# Altium PCB PCB1.PcbDoc (part 2 of 4)
Units mil, origin at the board's own origin, x right, y up, seen from the top; angles counter-clockwise.
Board outline 6796.85 x 4400 mil, 4 copper layers (Top Layer, Layer 1, Layer 2, Bottom Layer), stack 23.756 mil thick; 175 components, 152 nets, 720 pads, 180 vias.
Unrouted connection lines stored in the file: 4.
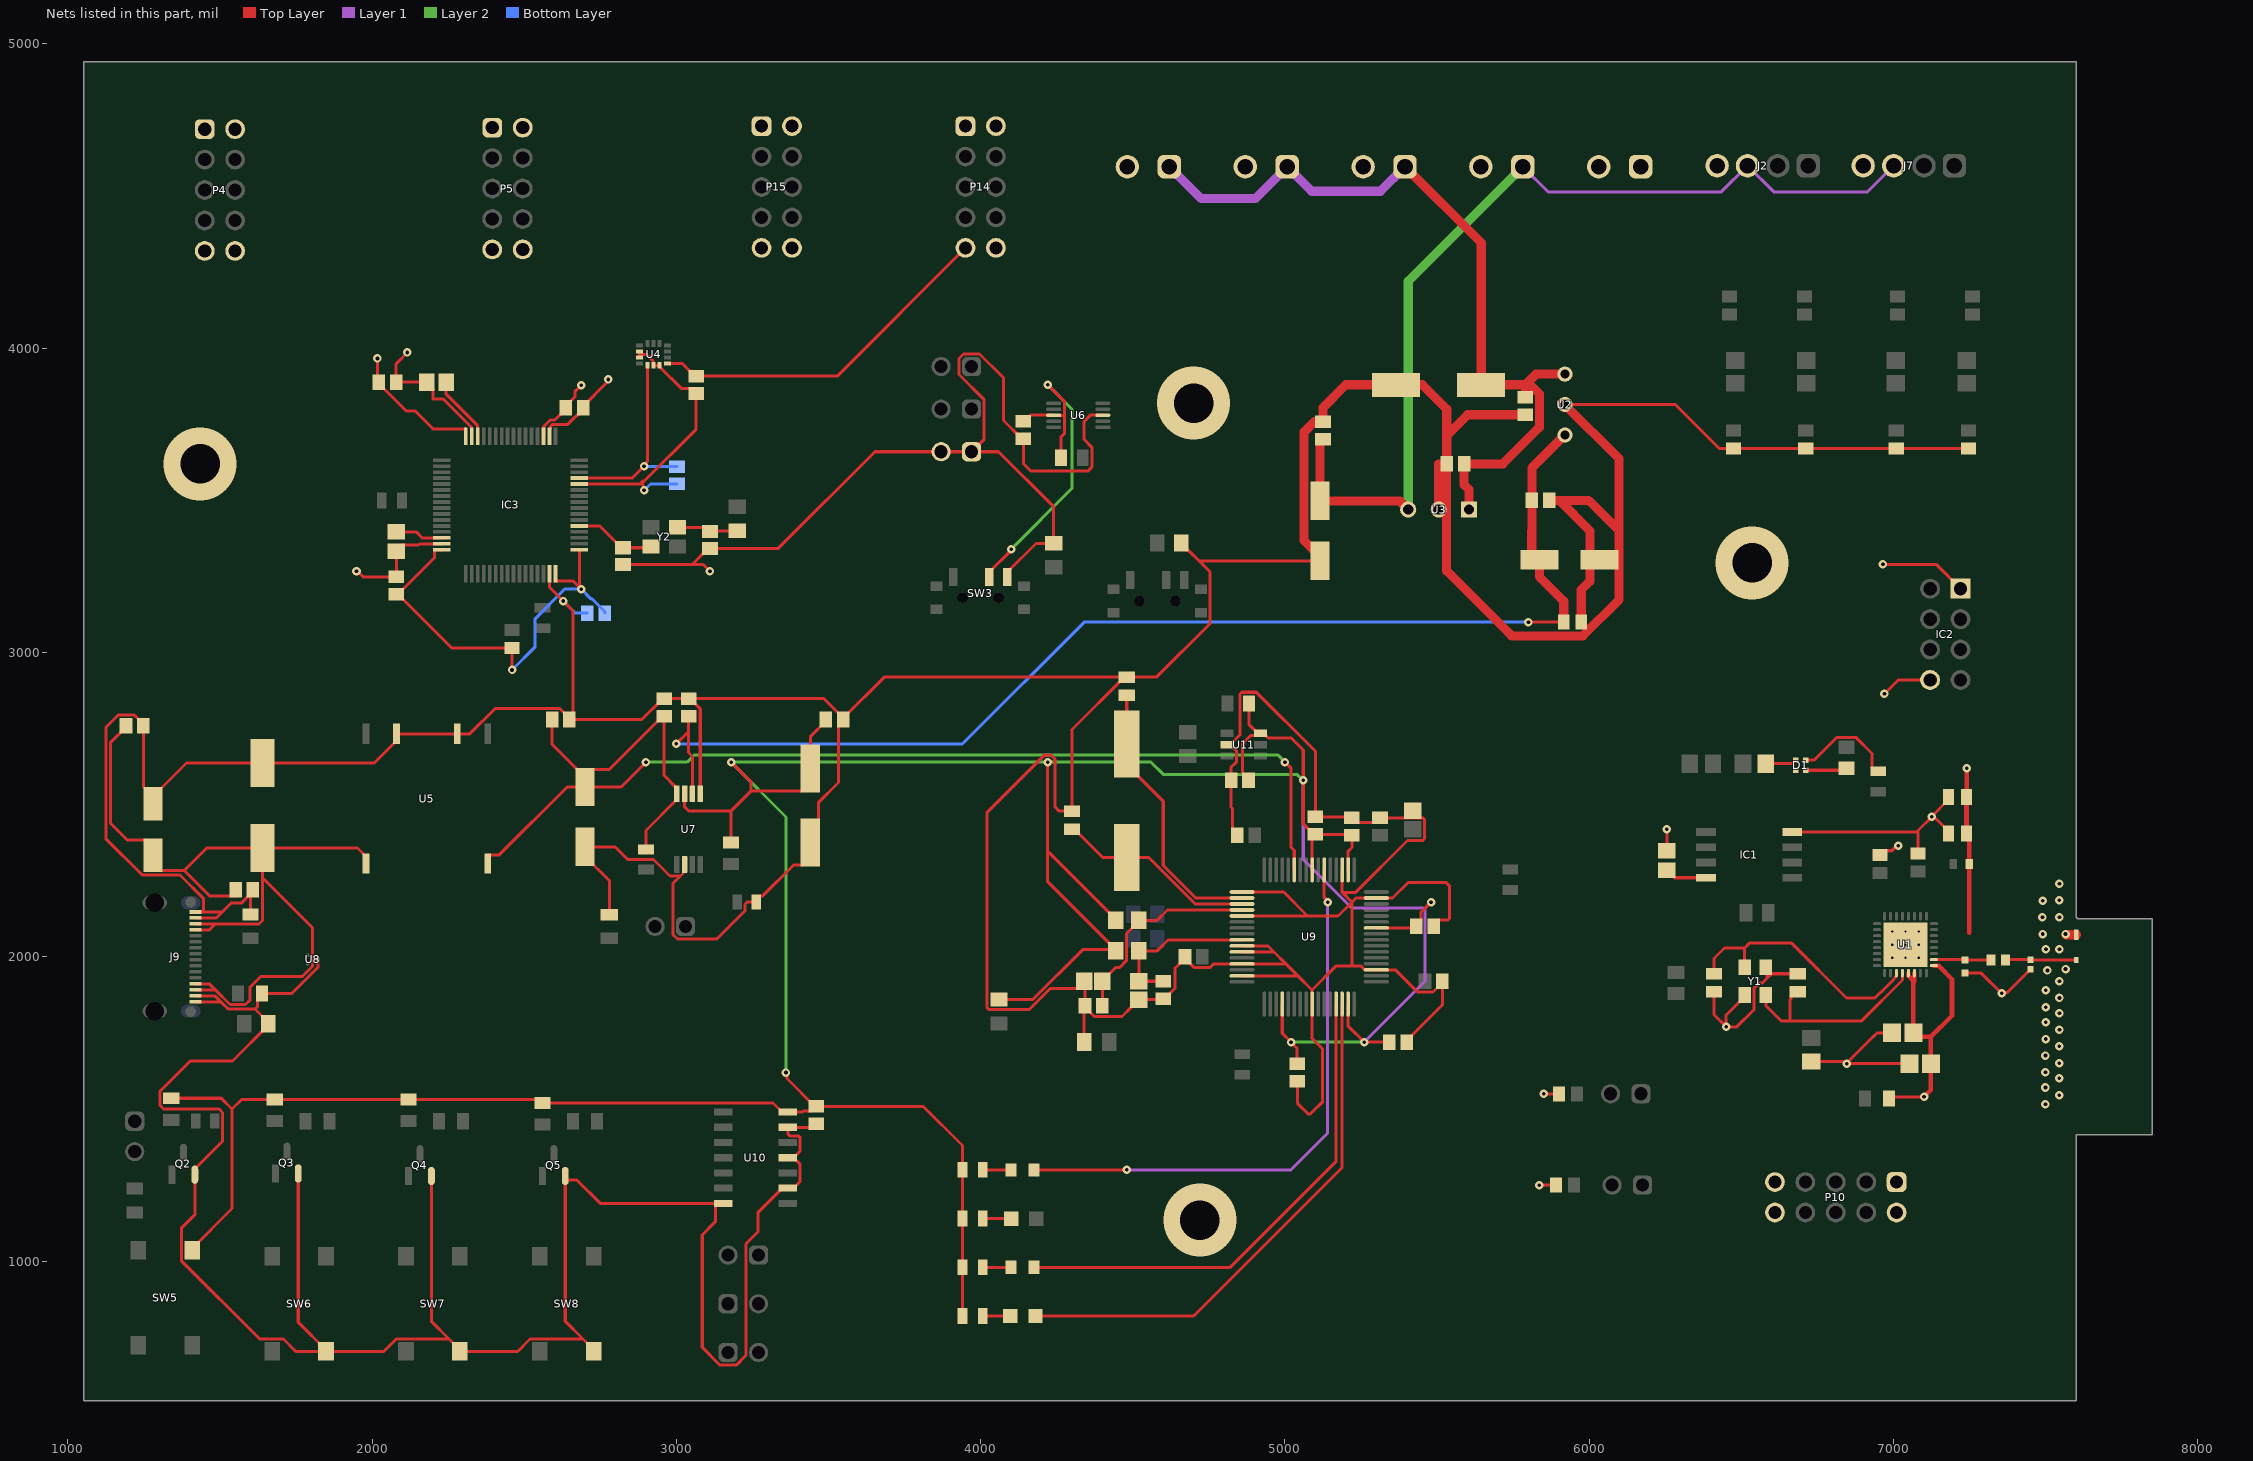
[diagram p4: the nets of this part, all layers, seen from the top]

## Part data (continued)
D2 D3: library part CMP-1724-00002-2, "LED RED DIFFUSED SMD", Case Code (Imperial)=0805, Case Code (Metric)=2012, Color=Red, Forward Current=20mA, Forward Voltage=2V, Lens Color=White, Max Operating Temperature=80°C, Min Operating Temperature=-25°C, Package Quantity=1, Approvals=UL, Case/Package=0805, Dominant Wavelength=635nm, Height=0.8mm, Illumination Color=Red, Lead Free="Lead Free", Length=2mm, Lens Style=Rectangular, Lens Transparency=Diffused, Luminous Intensity=11mcd, Mount="Surface Mount", Number of LEDs=1, Number of Pins=2, Packaging="Tape and Reel", REACH SVHC="No SVHC", Test Current=20mA, Viewing Angle=140°, Wavelength=635nm, Width=1.25mm
DS1 DS2: library part CMP-1724-00001-1, "LED, GREEN, 565 nm, 2 V, -25 to 80 degC, 2-Pin SMD, RoHS, Tape and Reel", Case Code (Imperial)=0805, Case Code (Metric)=2012, Max Operating Temperature="85 degC", Min Operating Temperature="-25 degC", Package Quantity=4000, Case\/Package=0805, ComponentLink1Description="Manufacturer URL", ComponentLink1URL=http://www.lumexinstruments.com/, ComponentLink2Description=Datasheet, ComponentLink2URL=http://www.lumex.com/content/files/ProductAttachment/SML-LXT0805GW-TR.pdf, DatasheetVersion="Rev. F, 09/2009", Length="2 mm", Mount="Surface Mount", Mounting Technology="Surface Mount", PackageDescription="2-Pin Surface Mount Device, Body 2 x 1.25 mm", PackageReference=SML-LXT0805, Packaging="Tape and Reel", REACH SVHC="No SVHC", RoHSCompliant=true, Width="1.25 mm"
FB1 FB2: library part CMP-2000-05194-2, "FERRITE BEAD 600 OHM 0805 1LN", Case Code (Imperial)=0805, Case Code (Metric)=2012, Current Rating=500mA, DC Resistance (DCR)=300mR, Frequency=100MHz, Max Operating Temperature=125°C, Min Operating Temperature=-40°C, Package Quantity=1, Case/Package=0805, Contact Plating=Tin, Core Material=Ferrite, Depth=1.45mm, Height=1.25mm, Impedance=600R, Lead Free="Lead Free", Length=2mm, Material=Ferrite, Max Current Rating=500mA, Max DC Current=500mA, Mount="Surface Mount", Number of Lines=1, Packaging="Tape and Reel", Termination=SMD/SMT, Test Frequency=100MHz, Weight=0.00392oz, Width=0.049inch
IC1: "Integrated Circuit", Manufacturer_Name=Winbond, Datasheet Link=https://www.winbond.com/hq/support/documentation/levelOne.jsp?__locale=en&DocNo=DA00-W25Q128JV, Height=2.16mm, Manufacturer_Part_Number=W25Q128JVSQ
IC2: "Integrated Circuit", Manufacturer_Name=Ai-Thinker, Datasheet Link=https://docs.ai-thinker.com/_media/esp8266/docs/esp-01_product_specification_en.pdf, Manufacturer_Part_Number=ESP-01
IC3: "Integrated Circuit", Manufacturer_Name=STMicroelectronics, Mouser Part Number=511-STM32H7A3RIT6, Arrow Part Number=STM32H7A3RIT6, Arrow Price/Stock=https://www.arrow.com/en/products/stm32h7a3rit6/stmicroelectronics, Datasheet Link=https://www.st.com/resource/en/datasheet/stm32h7a3ai.pdf, Height=1.6mm, Manufacturer_Part_Number=STM32H7A3RIT6, Mouser Price/Stock=https://www.mouser.co.uk/ProductDetail/STMicroelectronics/STM32H7A3RIT6?qs=xZ%2FP%252Ba9zWqZAEQXxnLVEdg%3D%3D
J2 J7: library part CMP-1502-02458-2, NexarPartId=105950651
J3 J4 J5 J6 J8: library part CMP-1502-02464-2, Color="Blue, Green", Current=10A, Max Operating Temperature=105°C, Min Operating Temperature=-40°C, Voltage=300V, Contact Material=Brass, Contact Plating="Brass, Tin", Current Rating=10A, Height=8.7mm, Housing Material=Nylon, Lead Pitch=3.5mm, Length=7.4mm, Mount="Through Hole", NexarPartId=18818288, Number of Contacts=2, Number of Levels=1, Number of Pins=2, Number of Positions Per Level=2, Number of Rows=1, Packaging=Box, Pitch=3.5052mm, Plating="Brass, Steel", REACH SVHC=Unknown, RoHS=Compliant, Stripping Length=-6mm, Termination=Screw, Voltage Rating=300V, Width=7.9mm, Wire Gauge (Max)=24AWG, Wire Gauge (Min)=16AWG, Wire/Cable Gauge=24AWG
J9: library part CMP-04767-000030-2, "CONN RCP USB2.0 TYP C 24P SMD RA", Current Rating=5A, Max Operating Temperature=85°C, Min Operating Temperature=-40°C, Voltage Rating=30V, Contact Material="Gold, Nickel", Country of Origin=CN, Gender=Receptacle, NexarPartId=114105384, Number of Contacts=16, Schedule B="8536695050, 8536695050", USB Standard="USB 2.0"
L1: library part CMP-06042-008021-1, "Wire Wound RF Inductor 4.3nH ±0.2nH 850mA 0.059Ω 0603 (1608)", Case Code (Imperial)=0603, Case Code (Metric)=1608, Current=750mA, Current Rating=850mA, DC Resistance (DCR)=59mR, Inductance=4.3nH, Max Operating Temperature=125°C, Min Operating Temperature=-55°C, Package Quantity=4000, Resistor Type=Wirewound, Self Resonant Frequency=6GHz, Test Frequency=100MHz, Case/Package=0603, Core Material=Non-Magnetic, DC Current=850mA, Depth=1mm, Height=0.8mm, Height - Seated (Max)=0.039inch, Length=1.6mm, Max DC Current=850mA, Military Standard=Not, Mount="Surface Mount", Packaging="Tape and Reel", Q Factor=35, Radiation Hardening=No, REACH SVHC="No SVHC", Series Resistance=59mR, Shielding=Unshielded, Termination=SMD/SMT, Weight=0.000106oz, Width=0.031inch
L2: library part CMP-03913-120013755-1, "7447840015G Multilayer Inductor, 1.5Nh, 0.3A, 0402 Rohs Compliant: Yes", Ambient Temperature Range High=105°C, Ambient Temperature Range Low=-55°C, Current Rating=300mA, Inductance=1.5nH, Max Operating Temperature=125°C, Height=500µm, Length=1mm, Min Operating Temperature=-55°C, NexarPartId=120013755, RoHS=Compliant, Width=500µm
P1 P2 P3 P6 P7 P8 P9 P11 P12 P13: library part CMP-1712-00002-6, Color=Black, Contact Resistance=20mΩ, Current Rating=3A, Max Operating Temperature=125°C, Min Operating Temperature=-40°C, Operating Supply Voltage=250V, Connector Type="Male Pin", Contact Gender=Male, Contact Material=Copper, Contact Mating Length=5.9944mm, Contact Plating=Gold, Gender=Male, Height=8.94mm, Housing Material=PBT, Lead Free="Lead Free", Lead Pitch=2.54mm, Mount="Through Hole", NexarPartId=20081794, Number of Contacts=2, Number of Pins=2, Number of Positions=2, Number of Rows=1, Orientation=Vertical, Packaging=Bulk, Pitch=2.54mm, REACH SVHC="No SVHC", RoHS=Compliant, Termination="Through Hole", Voltage Rating=250V
P4 P5 P10 P14 P15: library part CMP-1502-01084-3, Color=Black, Contact Resistance=20mΩ, Current Rating=3A, Flammability Rating="UL94 V-0", Insulation Resistance=1GΩ, Max Operating Temperature=105°C, Min Operating Temperature=-40°C, Operating Supply Voltage=250V, Connector Type="Male Pin", Contact Gender=Male, Contact Material=Copper, Contact Mating Length=5.9944mm, Contact Plating=Gold, Gender=Male, Height=2.54mm, Housing Material=PBT, Insulation=Insulated, Lead Pitch=2.54mm, Length=12.7mm, Mount="Through Hole", NexarPartId=18818163, Number of Contacts=10, Number of Pins=10, Number of Positions=10, Number of Rows=2, Orientation=Vertical, Packaging=Bulk, Pitch=2.54mm, REACH SVHC=Unknown, RoHS=Compliant, Row Spacing=2.54mm, Termination="Through Hole", Voltage Rating=250V, Width=12.7mm
Q2 Q3 Q4 Q5: library part CMP-07173-000101-1, "MOSFET N-CH 50V 220MA SOT-23", Case/Package=SOT-23, Continuous Drain Current (ID)=220mA, Drain to Source Breakdown Voltage=50V, Drain to Source Resistance=3.5R, Gate to Source Voltage (Vgs)=20V, Input Capacitance=27pF, Max Operating Temperature=150°C, Max Power Dissipation=360mW, Min Operating Temperature=-55°C, On-State Resistance=6R, Package Quantity=1, Threshold Voltage=1.3V, Contact Plating=Tin, Current Rating=220mA, Drain to Source Voltage (Vdss)=50V, Dual Supply Voltage=50V, Element Configuration=Single, Fall Time=9ns, Height=0.93mm, Lead Free="Lead Free", Length=2.92mm, Mount="Surface Mount", Nominal Vgs=1.3V, Number of Elements=1, Number of Pins=3, Packaging="Tape and Reel", Power Dissipation=360mW, Radiation Hardening=No, Rds On Max=3.5R, REACH SVHC="No SVHC", Rise Time=9ns, Termination=SMD/SMT, Turn-Off Delay Time=20ns, Turn-On Delay Time=2.5ns, Voltage Rating (DC)=50V, Weight=0.03g, Width=1.3mm
R1: library part CMP-2001-04775-1, Manufacturer="Vishay Dale", Part Number=TNPW0805499RBEEN
R2: library part CMP-2001-03663-1, Manufacturer="Vishay Dale", Part Number=CRCW0805200RFKEA
R3 R4 R6 R7 R16 R17 R22 R23 R30: library part CMP-2001-00582-2, "Metal Film Chip Resistor, High Reliability Type, 0.125 W, +/- 0.1%, -55 to 155 degC, 0805 (2012 Metric), RoHS, Tape and Reel", Case Code - in=0805, Case Code - mm=2012, Manufacturer=Panasonic, Operating Temperature Range=-55Cto+155C, Package / Case=0805(2012metric), Package Description="2-Pin Surface Mount Device, Body 2 x 1.25 mm", Power Rating=125mW(1/8W), Resistance=10kOhms, Temperature Coefficient=25PPM/C, Tolerance=0.1%, Voltage Rating=100V, Brand=Panasonic, Datasheet URL=https://industrial.panasonic.com/cdbs/www-data/pdf/RDM0000/AOA0000C307.pdf, Datasheet Version=02/2016, Factory Pack Quantity=5000, Height=0.5mm, Length=2mm, Manufacturer URL=http://www.panasonic.com/, Mounting Technology=SurfaceMount, Package Reference=0805, Packaging=Reel, Product=ThinFilmResistorsSMD, Product Category=ThinFilmResistors-SMD, RoHS=Details, Series=ERA-6A, Termination Style=SMD/SMT, Type=MetalFilmChipResistors, Width=1.25mm
R5: library part CMP-2001-00513-1, Manufacturer=Panasonic, Part Number=ERJ6ENF1202V
R8: library part CMP-03211-006924-1, "SMD Chip Resistor, Thin Film, 12KΩ, 100 V, 0805 [2012 Metric], 100 mW, 0.1%, RN73 Series", Manufacturer="TE Connectivity", Package=RN732A, Power Rating=0.1W, Resistance=12KΩ, Temperature="-55°C to 155°C", Temperature Coefficient=10ppm/°C, Temperature Range High=155°C, Temperature Range Low=-55°C, Tolerance=0.1%, Voltage Rating=100V, Automotive=No, Category=Res, ComponentLink2Description=Datasheet, ComponentLink2URL=https://www.te.com/commerce/DocumentDelivery/DDEController?Action=showdoc&DocId=Data+Sheet%7F1773270%7FP%7Fpdf%7FEnglish%7FENG_DS_1773270_P.pdf%7F1676162-2, Composition="Thin Film", Device Class L1="Passive Components", Device Class L2=Resistors, Device Class L3="Chip SMD Resistors", Height=0.65mm, Ipc Land Pattern Name=RESC200125X55, Lead Free=Yes, Manufacturer Part Number=RN73C2A12KBTG, Octopart=https://octopart.com/rn73c2a12kbtg-te+connectivity-22737727, octopart_url=https://octopart.com/rn73c2a12kbtg-te+connectivity-22737727, Packaging="250 cut tape length", RoHS=TRUE, Series=RN73
R9: library part CMP-2001-00580-1, Manufacturer=Panasonic, Part Number=ERA6AEB101V
R10: library part CMP-2001-00076-1, Manufacturer=Panasonic, Part Number=ERJ-6ENF24R9V
R11 R14 R15 R28 R29 R32 R48 R54: library part CMP-1013-00378-3, "RES Thick Film, 68Ω, 1%, 0.125W, 100ppm/°C, 0805", Case Code (Imperial)=0805, Case Code (Metric)=2012, Max Operating Temperature=155°C, Max Power Dissipation=125mW, Min Operating Temperature=-55°C, Package Quantity=5000, Resistance=68R, Temperature Coefficient=100ppm/°C, Tolerance=1%, Voltage Rating=150V, Case/Package=0805, Composition="Thick Film", Contact Plating=Tin, Depth=1.25mm, Features="Automotive AEC-Q200", Height=0.45mm, Lead Free="Lead Free", Length=2mm, Military Standard=Not, Mount="Surface Mount", Number of Terminations=2, Packaging="Tape and Reel", Power Rating=125mW, Radiation Hardening=No, Termination=SMD/SMT, Voltage Rating (DC)=150V, Weight=0.000194oz, Width=0.049inch
R12: library part CMP-2001-03692-2, "RES Thick Film, 22Ω, 1%, 0.125W, 100ppm/°C, 0805", Case Code (Imperial)=0805, Case Code (Metric)=2012, Max Operating Temperature=155°C, Max Power Dissipation=125mW, Min Operating Temperature=-55°C, Package Quantity=5000, Resistance=22R, Temperature Coefficient=100ppm/°C, Tolerance=1%, Voltage Rating=150V, Case/Package=0805, Composition="Thick Film", Contact Plating=Tin, Depth=1.25mm, Features="Automotive AEC-Q200", Height=0.45mm, Lead Free="Lead Free", Length=2mm, Military Standard=Not, Mount="Surface Mount", Number of Terminations=2, Packaging="Tape and Reel", Power Rating=125mW, Radiation Hardening=No, Termination=SMD/SMT, Voltage Rating (DC)=150V, Weight=0.000194oz, Width=1.25mm
R13: library part CMP-2001-00211-2, "RES SMD 499 OHM 1% 1/8W 0805", Case Code (Imperial)=0805, Case Code (Metric)=2012, Max Operating Temperature=155°C, Max Power Dissipation=125mW, Min Operating Temperature=-55°C, Package Quantity=1, Resistance=499R, Resistance Tolerance=1%, Resistor Type="Thick Film", Temperature Coefficient=100ppm/°C, Voltage Rating=150V, Case/Package=0805, Construction=Rectangular, Contact Plating=Tin, Depth=1.25mm, Features="Automotive AEC-Q200", Height=0.6mm, Lead Free="Lead Free", Length=2mm, Military Standard=Not, Mount="Surface Mount", Number of Terminations=2, Packaging="Tape and Reel", Power Rating=125mW, Radiation Hardening=No, REACH SVHC="No SVHC", RoHS Compliant=Yes, Series=ERJ, Technology="THICK FILM", Termination=SMD/SMT, Tolerance=1%, Voltage Rating (DC)=150V, Width=0.049inch, Working Voltage=150V
R18 R19 R24 R25: library part CMP-2001-00644-1, Manufacturer=Panasonic, Part Number=ERA6AEB472V
R20 R21 R26 R27: library part CMP-2001-00581-2, "RES 1K OHM 0.1% 1/8W 0805", Case Code (Imperial)=0805, Case Code (Metric)=2012, Max Operating Temperature=155°C, Max Power Dissipation=125mW, Min Operating Temperature=-55°C, Package Quantity=5000, Resistance=1kR, Resistance Tolerance=0.1%, Resistor Type="Thin Film", Temperature Coefficient=25ppm/°C, Voltage Rating=100V, Case/Package=0805, Construction=Rectangular, Contact Plating=Tin, Depth=1.25mm, Height=0.5mm, Length=2mm, Military Standard=Not, Mount="Surface Mount", Number of Pins=2, Number of Terminations=2, Packaging="Tape and Reel", Power Rating=125mW, Radiation Hardening=No, REACH SVHC="No SVHC", RoHS Compliant=Yes, Series=ERA-6A, Technology="THIN FILM", Termination=SMD/SMT, Tolerance=0.1%, Width=1.25mm, Working Voltage=100V
R31 R36 R44 R49 R56 R57 R60: library part CMP-1659-00013-4, "Chip Resistor, 10 KOhm, +/- 1%, 0.125 W, -55 to 155 degC, 0805 (2012 Metric), RoHS, Tape and Reel", Manufacturer=Yageo, Max Operating Temperature="155 degC", Min Operating Temperature="-55 degC", Package Quantity=5000, Voltage Rating="150 V", ComponentLink1Description="Manufacturer URL", ComponentLink1URL=http://www.yageo.com/, ComponentLink2Description=Datasheet, ComponentLink2URL=http://www.yageo.com/documents/recent/PYu-RC_Group_51_RoHS_L_04.pdf, DatasheetVersion="Rev. 4, 02/2016", Height="0.5 mm", Length="2 mm", Mount="Surface Mount", Mounting Technology="Surface Mount", PackageDescription="2-Pin Surface Mounted Device, Body 2 x 1.25 mm", PackageReference=0805, Packaging="Tape and Reel", Pins=2, REACH SVHC="No SVHC", RoHSCompliant=true
R37: library part CMP-2001-03961-1, Manufacturer="Vishay Dale", Part Number=CRCW08054K30FKEA
R38 R45: library part CMP-2000-06961-1, "Chip Resistor, 470 Ohm, +/- 1%, 125 mW, -55 to 155 degC, 0805 (2012 Metric), RoHS, Tape and Reel", Manufacturer=Yageo, Package Description="2-Pin Surface Mounted Device, Body 2 x 1.25 mm", Package Reference=0805, Power Rating=250mW, Resistance=470ohm, Resistance Tolerance=±1%, Resistor Case Style=0805[2012Metric], Resistor Element Type=ThickFilm, Temperature Coefficient=±100ppm/°C, Voltage Rating=150V, Automotive Qualification Standard=-, Datasheet URL=http://www.yageo.com/documents/recent/PYu-RC_Group_51_RoHS_L_7.pdf, Datasheet Version="Rev. 7, 05/2017", Manufacturer URL=http://www.yageo.com/, Mounting Technology=SurfaceMount, MSL=MSL1-Unlimited, Packaging=Tape&Reel, Product Range=-, SVHC=ToBeAdvised
R39 R43: library part CMP-03211-010210-1, "SMD Chip Resistor, Thin Film, 5.11KΩ, 100 V, 0805 [2012 Metric], 100 mW, 0.1%, RN73 Series", Manufacturer="TE Connectivity", Package=RN732A, Power Rating=0.1W, Resistance=5.11KΩ, Temperature="-55°C to 155°C", Temperature Coefficient=10ppm/°C, Temperature Range High=155°C, Temperature Range Low=-55°C, Tolerance=0.1%, Voltage Rating=100V, Automotive=No, Category=Res, ComponentLink2Description=Datasheet, ComponentLink2URL=https://www.te.com/commerce/DocumentDelivery/DDEController?Action=showdoc&DocId=Data+Sheet%7F1773270%7FP%7Fpdf%7FEnglish%7FENG_DS_1773270_P.pdf%7F1676162-2, Composition="Thin Film", Device Class L1="Passive Components", Device Class L2=Resistors, Device Class L3="Chip SMD Resistors", Height=0.65mm, Ipc Land Pattern Name=RESC200125X55, Lead Free=Yes, Manufacturer Part Number=RN73C2A5K11BTDF, Octopart=https://octopart.com/rn73c2a5k11btdf-te+connectivity-41219646, octopart_url=https://octopart.com/rn73c2a5k11btdf-te+connectivity-41219646, Packaging="1000 Reel", RoHS=TRUE, Series=RN73
R40 R41 R47: library part CMP-2100-03673-1, "Chip Resistor, 0 Ohm, Jumper, +/- 5%, 0.125 W, -55 to 155 degC, 0805 (2012 Metric), RoHS, Tape and Reel", Case Code (Imperial)=0805, Case Code (Metric)=2012, Manufacturer=Yageo, Max Operating Temperature=155degC, Min Operating Temperature=-55degC, Package Description="2-Pin Surface Mounted Device, Body 2 x 1.25 mm", Power Rating=125mW, Resistance=0mOhm, Temperature Coefficient=200ppm/degreesC, Tolerance=5%, Voltage Rating=150V, Case/Package=0805, Composition=ThickFilm, Contact Plating=Tin, Datasheet URL=http://www.yageo.com/NewPortal/yageodocoutput?fileName=/pdf/R-Chip/PYu-RC_Group_51_RoHS_L_5.pdf, Datasheet Version="Rev. 5, 10/2016", Depth=1.25mm, Height=0.5mm, Lead Free=LeadFree, Length=2mm, Manufacturer URL=http://www.yageo.com/, Military Standard=Not, Number of Pins=2, Package Reference=0805, Packaging=TapeandReel, Radiation Hardening=No, REACH SVHC=Unknown, RoHSCompliant=true, Termination=SMD/SMT, Voltage Rating (DC)=150V, Width=1.25mm
R42: library part CMP-2001-03615-2, "RES Thick Film, 1.5kΩ, 1%, 0.125W, 100ppm/°C, 0805", Case Code (Imperial)=0805, Case Code (Metric)=2012, Max Operating Temperature=155°C, Max Power Dissipation=125mW, Min Operating Temperature=-55°C, Package Quantity=10, Resistance=1.5kR, Temperature Coefficient=100ppm/°C, Tolerance=1%, Voltage Rating=150V, Case/Package=0805, Composition="Thick Film", Contact Plating=Tin, Depth=1.25mm, Features="Automotive AEC-Q200", Height=0.45mm, Lead Free="Lead Free", Length=2mm, Military Standard=Not, Number of Terminations=2, Packaging="Tape and Reel", Power Rating=125mW, Radiation Hardening=No, Termination=SMD/SMT, Voltage Rating (DC)=150V, Weight=0.000194oz, Width=0.049inch
R46 R50 R58 R61: library part CMP-03211-000756-1, "SMD Chip Resistor, Thin Film, 100Ω, 100 V, 0805 [2012 Metric], 100 mW, 0.1%, RN73 Series", Manufacturer="TE Connectivity", Package=RN732A, Power Rating=0.1W, Resistance=100Ω, Temperature="-55°C to 155°C", Temperature Coefficient=10ppm/°C, Temperature Range High=155°C, Temperature Range Low=-55°C, Tolerance=0.1%, Voltage Rating=100V, Automotive=No, Category=Res, ComponentLink2Description=Datasheet, ComponentLink2URL=https://www.te.com/commerce/DocumentDelivery/DDEController?Action=showdoc&DocId=Data+Sheet%7F1773270%7FP%7Fpdf%7FEnglish%7FENG_DS_1773270_P.pdf%7F1676162-2, Composition="Thin Film", Device Class L1="Passive Components", Device Class L2=Resistors, Device Class L3="Chip SMD Resistors", Height=0.65mm, Ipc Land Pattern Name=RESC200125X55, Lead Free=Yes, Manufacturer Part Number=RN73C2A100RBTDF, Octopart=https://octopart.com/rn73c2a100rbtdf-te+connectivity-41188433, octopart_url=https://octopart.com/rn73c2a100rbtdf-te+connectivity-41188433, Packaging="1000 Reel", RoHS=TRUE, Series=RN73
R51 R52: library part CMP-2100-03670-1, "Chip Resistor, 10 Ohm, +/- 1%, 0.125 W, -55 to 155 degC, 0805 (2012 Metric), RoHS, Tape and Reel", Case Code (Imperial)=0805, Case Code (Metric)=2012, Manufacturer=Yageo, Max Operating Temperature=155degC, Max Power Dissipation=125mW, Min Operating Temperature=-55degC, Package Description="2-Pin Surface Mounted Device, Body 2 x 1.25 mm", Package Quantity=1, Resistance=10Ohm, Temperature Coefficient=200ppm/degreesC, Tolerance=1%, Voltage Rating=150V, Case/Package=0805, Composition=ThickFilm, Datasheet URL=http://www.yageo.com/NewPortal/yageodocoutput?fileName=/pdf/R-Chip/PYu-RC_Group_51_RoHS_L_5.pdf, Datasheet Version="Rev. 5, 10/2016", Depth=1.25mm, Height=0.5mm, Lead Free=LeadFree, Length=2mm, Manufacturer URL=http://www.yageo.com/, Number of Pins=2, Number of Terminations=2, Package Reference=0805, Packaging=TapeandReel, Power Rating=125mW, REACH SVHC=NoSVHC, RoHSCompliant=true, Termination=SMD/SMT, Voltage Rating (DC)=150V, Width=1.25mm
R53: library part CMP-2100-03671-1, "Chip Resistor, 1 KOhm, +/- 1%, 125 mW, -55 to 155 degC, 0805 (2012 Metric), RoHS, Tape and Reel", Case Code (Imperial)=0805, Case Code (Metric)=2012, Manufacturer=Yageo, Max Operating Temperature=155degC, Max Power Dissipation=125mW, Min Operating Temperature=-55degC, Package Description="2-Pin Surface Mounted Device, Body 2 x 1.25 mm", Package Quantity=1, Resistance=1KOhm, Temperature Coefficient=100ppm/degreesC, Tolerance=1%, Voltage Rating=150V, Case/Package=0805, Composition=ThickFilm, Datasheet URL=http://www.yageo.com/NewPortal/yageodocoutput?fileName=/pdf/R-Chip/PYu-RC_Group_51_RoHS_L_5.pdf, Datasheet Version="Rev. 5, 10/2016", Depth=1.25mm, Height=0.024inch, Lead Free=LeadFree, Length=0.079inch, Manufacturer URL=http://www.yageo.com/, Military Standard=Not, Number of Pins=2, Number of Terminations=2, Package Reference=0805, Packaging=TapeandReel, Power Rating=125mW, REACH SVHC=Unknown, RoHSCompliant=true, Termination=SMD/SMT, Voltage Rating (DC)=150V, Width=0.049inch
R55: library part CMP-2001-04934-2, "RES Thick Film, 12kΩ, 1%, 0.125W, 100ppm/°C, 0805", Case Code (Imperial)=0805, Case Code (Metric)=2012, Max Operating Temperature=155°C, Max Power Dissipation=125mW, Min Operating Temperature=-55°C, Package Quantity=10, Resistance=12kR, Temperature Coefficient=100ppm/°C, Tolerance=1%, Voltage Rating=150V, Case/Package=0805, Composition="Thick Film", Contact Plating=Tin, Depth=1.25mm, Features="Automotive AEC-Q200", Height=0.45mm, Lead Free="Lead Free", Length=2mm, Military Standard=Not, Mount="Surface Mount", Number of Terminations=2, Packaging="Tape and Reel", Power Rating=125mW, Radiation Hardening=No, Termination=SMD/SMT, Voltage Rating (DC)=150V, Weight=0.000194oz, Width=0.049inch
R59: library part CMP-2001-01361-1, Manufacturer=Yageo, Part Number=RC0805JR-072KL
R62: library part CMP-009-00007-5, "Chip Resistor, 0 Ohm, 0.125 W, -55 to 155 degC, 0805 (2012 Metric)", Case/Package=0805, Max Operating Temperature=155°C, Min Operating Temperature=-55°C, Power=125mW, Tolerance=5%, Voltage Rating=50V, Mounting Technology=SM, Pins=2, RoHS Compliant=True
RF: library part CMP-00025-00004-9
SW3 SW4: library part CMP-2000-06884-2, "SWITCH SLIDE SPDT 300MA 6V", Contact Current Rating=300mA, Contact Resistance=70mR, Insulation Resistance=100mR, Max Operating Temperature=85°C, Max Voltage Rating (DC)=6V, Min Operating Temperature=-20°C, Package Quantity=1, Actuator Length=1.5mm, Actuator Material=Nylon, Actuator Type=Standard, Contact Material="Copper Alloy", Contact Plating=Silver, Current Rating=300mA, Depth=5mm, Lead Free="Lead Free", Length=7.7mm, Max Current Rating=300mA, Mechanical Life=10000Cycles, Mount="Surface Mount", Orientation="Right Angle", Packaging="Tape and Reel", REACH SVHC="No SVHC", Switch Function=On-On, Switch Travel=1.5mm, Termination="Gull Wing", Throw Configuration=SPDT, Voltage Rating (AC)=6V, Voltage Rating (DC)=6V, Width=6.7mm
SW5 SW6 SW7 SW8: library part CMP-2000-05160-2, "SWITCH TACTILE SPST-NO 0.05A 12V", Case/Package=SMD/SMT, Color=Black, Contact Resistance=100mR, Current Rating=50mA, Max Operating Temperature=60°C, Max Voltage Rating (DC)=12V, Min Operating Temperature=-20°C, Operating Force=160gf, Package Quantity=1, Actuator Length=0.85mm, Actuator Material=Nylon, Actuator Type=Standard, Contact Material=Silver, Contact Plating=Silver, Depth=9mm, Illumination Type=Non-Illuminated, Lead Free="Lead Free", Length=6mm, Max Current Rating=50mA, Mechanical Life=100000Cycles, Mount="Surface Mount", Orientation=Straight, Packaging="Tape and Reel", REACH SVHC="No SVHC", Switch Function=Off-Mom, Termination="Gull Wing", Throw Configuration=SPST, Voltage Rating (DC)=12V
U1: library part CMP-2000-07453-1, "Low-Power, Highly-Integrated Wi-Fi Solution, 2.5 to 3.6 V, 80 mA, -40 to 125 degC, 32-Pin QFN", Manufacturer="Espressif Systems", Package Description="32-Pin Quad Falt No-Lead, Body 5 x 5 mm, Pitch 0.5 mm", Package Reference=QFN-32, Datasheet URL=http://espressif.com/sites/default/files/documentation/0a-esp8266ex_datasheet_en.pdf, Datasheet Version="Rev. 5.4, 04/2017", Manufacturer URL=http://espressif.com, Mounting Technology=SurfaceMount
U2: library part CMP-2000-05426-2, Case/Package=SIP, Max Input Voltage=36V, Max Input Voltage (DC)=32V, Max Operating Temperature=85°C, Max Output Current=1A, Max Output Power=3.3W, Min Input Voltage=4.75V, Min Input Voltage (DC)=5.5V, Min Operating Temperature=-40°C, Nominal Output Voltage=3.3V, Nominal Supply Current=1mA, Switching Frequency=500kHz, Depth=7.6mm, Efficiency=79%, Height=10.2mm, Isolation=Isolated, Length=11.7mm, Max Supply Voltage=36V, Min Supply Voltage=4.75V, Mount="Through Hole", NexarPartId=9539342, Number of Outputs=1, Number of Pins=3, Output Current=1A, Output Power=3.3W, Output Type=Fixed, Output Voltage=3.3V, Power Rating=3.3W, Radiation Hardening=No, REACH SVHC="No SVHC", RoHS=Compliant, Weight=1.9g, Width=7.6mm
U3: library part CMP-2000-05427-1, "DC/DC converter, 5 VDC, 1000 mA, -40 to 85 degC, 3-Pin SIP, RoHS", Input Voltage DC Max=36V, Input Voltage DC Min=6.5V, Manufacturer=Tracopower, Output Current Max=1A, Output Power Max=5W, Output Voltage Nom.=5V, Package Description="3-Pin Single In-line Package, Body 11.7 x 7.6 mm, Pitch 2.54 mm", Package Reference=SIP-3, Approvals & Standards=IEC,UL, Datasheet URL=https://datasheet.ciiva.com/6815/tsr1-6815641.pdf, Datasheet Version=Jan-15, DC / DC Converter Mounting=ThroughHole, DC / DC Converter Output Type=Fixed, DC / DC Converter Type=SIP, Depth=11.7mm, Height=10.2mm, Manufacturer URL=http://www.tracopower.com/home, No. of Outputs=1Output, Product Range=TSR-1Series, Width=7.6mm
U4: library part CMP-12177-000010-1, "INEMO INERTIAL MODULE: 3D ACCELE", Manufacturer=STMicroelectronics, Max Supply Voltage=3.6V, Min Supply Voltage=1.62V, Operating Supply Current=0.55mA, Package=LGA-14L-DM00249496, Temperature="-40°C to +85°C", Temperature Range High=+85°C, Temperature Range Low=-40°C, Accel Range=2/4/8/16g, Accel Sensitivity=0.061/0.122/0.244/0.488mV/g, Automotive=No, Category=IC, ComponentLink2Description=Datasheet, ComponentLink2URL=https://www.st.com/resource/en/datasheet/lsm6dsox.pdf, Device Class L1=Sensors, Device Class L2="Motion Sensors", Device Class L3="Inertial Measurement Units (IMUs)", Digikey Description="INEMO INERTIAL MODULE: 3D ACCELE", Footprint Url=https://www.st.com/content/ccc/resource/technical/document/technical_note/73/17/9c/16/dd/96/4a/01/CD00134799.pdf/files/CD00134799.pdf/jcr:content/translations/en.CD00134799.pdf, Gyro Range=125/250/500/1000/2000°/s, Gyro Sensitivity=4.375/8.75/17.5/35/70LSB/°/s, Height=0.86mm, Lead Free=Yes, Manufacturer Part Number=LSM6DSOXTR, Mouser Description="LSM6DSOX: 3.6 V 3 Axis Accelerometer Gyroscope iNEMO Inertial Module - LGA-14L", Octopart=https://octopart.com/lsm6dsoxtr-stmicroelectronics-98102600, RoHS=TRUE, Sensor Output=I2C,SPI,Other, Sensor Type=Temperature,Accelerometer,Gyroscope
U5: library part CMP-01539-55433846-1, "TSRN 1-2433SM Non Isolated Board Mount Dc/dc Converter, Surface Mount Dip, 5.5 W, 1.5 V, 5.5 V, 1 A, 4.6 V Rohs Compliant: Yes", Case/Package=SMD/SMT, Max Input Voltage=42V, Max Operating Temperature=85°C, Max Output Current=1A, Max Output Power=5.5W, Max Output Voltage=5.5V, Min Input Voltage=4.6V, Min Operating Temperature=-40°C, Min Output Voltage=1.5V, Output Voltage=3.3V, Depth=15.2mm, Efficiency=80%, Height=7mm, Isolation=Non-Isolated, Length=15.2mm, Max Input Voltage (DC)=42V, Min Input Voltage (DC)=4.6V, Mount="Surface Mount", NexarPartId=55433846, Number of Outputs=1, Number of Pins=6, Output Current=1A, Output Power=5.5W, REACH SVHC="No SVHC", RoHS=Compliant, Weight=1.7kg, Width=9.3mm
U6: library part CMP-04892-000058-1, "IC SWITCH DUAL SPDT 10MSOP", Case/Package=VSSOP, High Level Output Current=50mA, Max Operating Temperature=85°C, Max Supply Current=1uA, Max Supply Voltage=5.5V, Min Operating Temperature=-40°C, Min Supply Voltage=1.8V, On-State Resistance=10R, Package Quantity=1, Bandwidth=220MHz, Contact Plating=Gold, Height=1.02mm, Lead Free="Lead Free", Length=3mm, Low Level Output Current=50mA, Mount="Surface Mount", Number of Bits=2, Number of Channels=2, Number of Inputs=2, Number of Outputs=4, Number of Pins=10, Operating Supply Current=1uA, Packaging="Tape and Reel", Polarity=Non-Inverting, Radiation Hardening=No, Series=-, Supply Type=Single, Throw Configuration=SPDT, Turn-Off Delay Time=3.8ns, Turn-On Delay Time=5.7ns, Weight=0.000663oz, Width=3mm
U7: library part CMP-0339-00043-2, "Dual In / Single Out Autoswitching Power Mux, 2.8 to 5.5 V, -40 to 85 degC, 8-pin TSSOP (PW), Green (RoHS & no Sb/Br)", IN1 Output Current(Max)(A)=1.25, IN1, IN2 Input Voltage(Max)(V)=5.5, IN1, IN2 Input Voltage(Min)(V)=2.8, Manufacturer="Texas Instruments", Code_JEDEC=MO-153, ComponentLink1Description=Datasheet, ComponentLink1URL=http://www.ti.com/general/docs/lit/getliterature.tsp?genericPartNumber=TPS2113A&fileType=pdf, DatasheetVersion=SBVS045C, Eco-Plan="Green (RoHS & no Sb/Br)", IN1 rDS(on)(Typ)(mOhm)=84, IN2 Output Current(Max)(A)=1.25, IN2 rDS(on)(Typ)(Ohms)=0.084, Mounting Technology="Surface Mount", Number of Inputs=2, PackageDescription="8-Pin Plastic Thin Small Outline Package 3 x 4.4 mm Body ,0.65 mm Pitch", PackageReference=PW0008A, PackageVersion="revG, Feb-2011", PartNumber=TPS2113APW, SubFamily="Power Multiplexer (MUX)"
U8: library part CMP-0326-00046-3, "ESD Solution for Super-Speed (6 Gbps) USB 3.0 Interface, 2 Channels, -40 to +85 degC, 3-pin SOT (DRT), Green (Rohs & No Sb/Br)", Breakdown Voltage(Min)(V)=9, Differential Capacitance(pF)=0.01, IO Capacitance(Typ)(pF)=0.7, IO Leakage Current(nA)=10, Manufacturer="Texas Instruments", 1394 / Firewire=TRUE, ComponentLink1Description=Datasheet, ComponentLink1URL=http://www.ti.com/general/docs/lit/getliterature.tsp?genericPartNumber=TPD2EUSB30&fileType=pdf, ComponentLink2Description="URL Link1", ComponentLink2URL=SamplesURL:http://www.ti.com/product/tpd2eusb30#samples, DatasheetVersion=SLVSAC2C, Eco-Plan="Green (RoHS & no Sb/Br)", HDMI=TRUE, IEC 61000-4-2 Air-Gap(+/- kV)=8, IEC 61000-4-2 Contact(+/- kV)=8, Mounting Technology="Surface Mount", PackageDescription="3-Flat Lead Plastic Small Outline, 1 x 1 mm (inc leads), 0.35 mm Pitch", PackageReference=DRT0003A, PackageVersion="revD, Jun-2008", PartNumber=TPD2EUSB30DRTR, Serial ATA / eSATA=TRUE, SubFamily="ESD Solution", USB Full Speed=TRUE, USB High Speed=TRUE, USB Super Speed=TRUE
U9: library part CMP-0078-00023-3, "Dual High Speed USB To Multipurpose UART/FIFO IC, 64-pin LQFP, Tape and Reel", Manufacturer=FTDI, ComponentLink1Description="Manufacturer URL", ComponentLink1URL=http://www.ftdichip.com/, ComponentLink2Description=Datasheet, ComponentLink2URL=http://www.ftdichip.com/Support/Documents/DataSheets/ICs/DS_FT2232H.pdf, DatasheetVersion="ver 2.21, Jun-2012", PackageDescription="64-Pin Thin Quad Flat Pack, 10 x 10 x 1.4 mm Body, 0.5 mm Pitch", PackageReference=LQFP-64, PackageVersion=Jun-12, PartNumber=FT2232HL-Reel, RevisionNote="DatasheetVersion updated to 2.21 Jun-2012"
U10: library part CMP-1615-00149-4, "IC INVERTER SCHMITT 6CH 14SOIC", Manufacturer="TEXAS INSTRUMENTS", Max Supply Voltage=3.6V, Min Supply Voltage=1.65V, Nominal Supply Current=1uA, Package=D0014A, Temperature="-40°C to +125°C", Temperature Range High=+125°C, Temperature Range Low=-40°C, Automotive=No, Category=IC, ComponentLink2Description=Datasheet, ComponentLink2URL=https://www.ti.com/lit/gpn/SN74LVC14A, Device Class L1="Integrated Circuits (ICs)", Device Class L2="Logic ICs", Device Class L3="Logic Gates", Digikey Description="IC INVERTER SCHMITT 6CH 14SOIC", Height=1.75mm, Lead Free=Yes, Logic Function Desc=Inverting, Manufacturer Part Number=SN74LVC14AD, Mouser Description="In a Pack of 10, Texas Instruments SN74LVC14AD, Hex Schmitt Trigger CMOS Inverter, 14-Pin SOIC", Number Of Circuits=6, Number of Inputs=1, Number of Outputs=1, Octopart=https://octopart.com/sn74lvc14ad-texas+instruments-22854, Propagation Delay=3.2ns, RoHS=TRUE, Standoff Height=0.1mm
U11: library part CMP-0162-00356-2, "IC EEPROM 2K SPI 2MHZ SOT23-6", Case/Package=SOT-23, Frequency=2MHz, Max Operating Temperature=85°C, Max Supply Voltage=5.5V, Min Operating Temperature=-40°C, Min Supply Voltage=2.5V, Nominal Supply Current=2mA, Package Quantity=3000, Access Time=250ns, Contact Plating=Tin, Density=2Kb, Height=1.3mm, Interface=Serial, Lead Free="Lead Free", Length=3.1mm, Max Frequency=2MHz, Memory Size=2Kb, Memory Type=EEPROM, Mount="Surface Mount", Number of Pins=6, Packaging="Tape and Reel", Radiation Hardening=No, REACH SVHC="No SVHC", Width=1.8mm
Y1: library part CMP-27762-002739-1, "Crystal 26MHz ±10ppm 10pF SMD-4 3.2mm x 2.5mm", Case/Package=CSMD, ESR (Equivalent Series Resistance)=50R, Frequency=26MHz, Frequency Stability=10ppm, Load Capacitance=10pF, Max Operating Temperature=60°C, Min Operating Temperature=-10°C, Operating Frequency="26 MHz", Package Quantity=1000, Resistor Type=Ceramic, Depth=2.5mm, Frequency Tolerance=10ppm, Height=0.031inch, Lead Free="Lead Free", Length=3.2mm, Mount="Surface Mount", Number of Pins=4, Packaging="Tape and Reel", REACH SVHC="No SVHC", Series=ABM8, Series Resistance=50R, Termination=SMD/SMT, Tolerance=10ppm, Width=2.5mm
Y2: library part CMP-27762-015716-1, "Crystal 24MHz ±20ppm (Tol) ±50ppm (Stability) 12pF FUND 50Ω Automotive 4-Pin Ultra Mini-CSMD T/R", Case/Package=SMD/SMT, ESR (Equivalent Series Resistance)=50R, Frequency=24MHz, Frequency Stability=50ppm, Frequency Tolerance=20ppm, Load Capacitance=12pF, Max Operating Temperature=125°C, Min Operating Temperature=-40°C, Ratings=AEC-Q200, Height=0.031inch, Length=0.126inch, Mount="Surface Mount", Packaging="Cut Tape", RoHS Compliant=Yes, Series=ABM8AIG, Width=0.098inch
Y3: "Crystal or Oscillator", Manufacturer_Name=ABRACON, Mouser Part Number=815-ABLS2-12-B4YT, Datasheet Link=https://abracon.com/Resonators/abls.pdf, Manufacturer_Part_Number=ABLS2-12.000MHZ-B4Y-T, Mouser Price/Stock=https://www.mouser.co.uk/ProductDetail/ABRACON/ABLS2-12000MHZ-B4Y-T?qs=DZ%2FvJMgWWIs6Scm%252BixQ6gw%3D%3D

## Free pads (board coordinates)
  round 2.25 on Top Overlay: 1(5238.35,862.08) 1(5238.51,884.39) 1(5238.53,862.09) 1(5294.13,883.46) 1(5294.2,862.93) 1(5310.02,883.19) 1(5310.02,883.19) 1(5310.1,863.16) 1(5323.31,687.48) 1(5338.56,1072.52) 1(5341.48,673.2) 1(5356.66,1015.33) 1(5358.63,730.75) 1(5366.78,1003.06) 1(5366.78,1003.06) 1(5366.84,882.24) 1(5366.97,864.02) 1(5375.47,717.54) 1(5382.2,881.98) 1(5382.55,1015.86) 1(5385.14,730.16) 1(5402.97,959.18) 1(5404.64,787.09) 1(5414.35,798.99) 1(5417.4,970.96) 1(5426.82,958.83) 1(5426.82,958.83) 1(5436.72,881.07) 1(5447.58,905.1) 1(5448.87,841.27) 1(5460.26,915.75) 1(5460.27,915.75) 1(5462.38,830.93) 1(5496.19,771.9) 1(5498.42,975.66) 1(5499.45,756.85) 1(5501.39,990.73) 1(5501.39,990.73) 1(5503.77,918.32) 1(5514.86,775.81) 1(5514.87,685.67) 1(5514.88,685.67) 1(5515.41,1062.08) 1(5518.9,839.85) 1(5520.2,986.42) 1(5526.71,631.06) 1(5528.11,894.98) 1(5532.48,705.83) 1(5537.27,1057.17) 1(5537.27,1057.17) 1(5550.05,636.02) 1(5550.37,1111.47) 1(5580.8,805.62) 1(5580.8,805.62) 1(5581.45,839.92) 1(5645.25,805.14) 1(5654.25,960.89) 1(5703.72,986.74)

## Via types
v1: diameter 28, hole 12, Top Layer to Bottom Layer, 167 vias
v2: diameter 19.68, hole 7.87, Top Layer to Bottom Layer, 9 vias
v3: diameter 240, hole 130, Top Layer to Bottom Layer, 4 vias

## Nets (pads, with @x,y where several pads share a name; then routed paths per layer and width w, separated by ;. In a path a pad name is that pad's centre, name@x,y a point inside that pad or via, vN(x,y) a via of type N, cw(c..) or ccw(c..) an arc to the next point about the centre after c; other vN are vias at no path point)
3V3AKKU: C4.1 C11.2 C14.2 C39.2 U2.3 U7.6 | length 4118.2
  Top Layer w10: v1(3000,2700) 3040,2740 ; C39.2@3040,2791.46 3040,2740 ; U7.6@3052.8,2535.79 3052.8,2658.74 3040,2671.54 3040,2740 ; v1(5800,3100) 5915.86,3100 C4.1@5916.25,3100.39
  Top Layer w30: C11.2@5836.57,3305 C11.2@5836,3305 ; C4.1@5916.25,3100.39 5916.25,3169 5836,3249.25 C11.2@5836,3305 ; U2.3@5920,3715 5811.46,3606.46 C14.2@5811.46,3500 5811.46,3400.46 5811,3400 5811,3305 C11.2@5836,3305
  Bottom Layer w10: v1(3000,2700) 3940,2700 4340,3100 v1(5800,3100)
3V3BUS: C29.2 C32.2 C38.2 R37.2 U5.5 U7.8 U9.59 | length 4234.3
  Top Layer w10: U5.5@2380,2307 2380,2329.5 2386,2335.5 2418.29,2335.5 2641.22,2558.43 C29.2@2700,2558.43 2818.43,2558.43 v1(2900,2640) ; C32.2@2591.46,2780 2591.46,2698.47 2700,2589.92 2726.5,2616.42 2780.04,2616.42 2955.08,2791.46 C38.2@2960,2791.46 2960,2596.1 3001.61,2554.49 U7.8@3001.61,2535.79 3001.61,2517.09 2900,2415.47 R37.2@2900,2352.48 ; v1(5000,2640) 5020.51,2619.49 5020.51,2359.49 5030.39,2349.61 U9.59@5030.39,2286.06
  Layer 2 w10: v1(2900,2640) 3035.41,2640 3059.41,2664 4976,2664 v1(5000,2640)
5VBUS: C28.2 C30.2 C31.2 C35.2 J9.A4 J9.A9 J9.B4 J9.B9 U5.1 | length 2997.8
  Top Layer w10: C31.2@1191.46,2760 1191.46,2755.08 1140,2703.62 1140,2440 1195.87,2384.13 1253.5,2384.13 1280,2357.64 C30.2@1280,2334.02 1280,2310.39 1306.5,2283.9 1382.48,2283.9 ; J9.A9@1419.76,1891.73 1484.98,1891.73 ; J9.B4@1419.76,1911.42 1465.3,1911.42 1484.98,1891.73 ; J9.B9@1419.76,2088.58 1464.94,2088.58 1484.63,2108.27 ; J9.A4@1419.76,2108.27 1484.63,2108.27 ; C35.2@1558.03,2200 1466.38,2200 1382.48,2283.9 ; U5.1@1980,2307 1980,2329.5 1951.86,2357.64 C28.2@1640,2357.64 ; 1382.48,2283.9 1456.22,2357.64 C28.2@1640,2357.64 ; 1484.63,2108.27 1628.67,2108.27 1640,2119.6 1640,2260 ; 1484.98,1891.73 1533.29,1843.43 1583.83,1843.43 1599.37,1858.97 1599.37,1901.03 1633.36,1935.03 1770.02,1935.03 1804.01,1969.02 1804.01,2095.99 1640,2260 ; 1640,2260 C28.2@1640,2357.64
+3V3: C2.1 C5.2 C6.2 C7.1 C8.1 C20.2 C21.2 C22.2 C23.2 C24.2 C27.2 C33.2 C34.2 C37.2 C43.2 C44.2 C45.2 C46.2 C53.2 C54.2 C55.2 D1.1 FB1.1 FB2.1 IC2.1 IC3.1 IC3.13 IC3.19 IC3.32 IC3.48 IC3.64 J8.1 L1.1 P4.1 P4.2 P5.1 P5.2 P10.1 P10.2 P14.9 P14.10 P15.1 P15.2 R4.2 R6.2 R7.2 R8.2 R11.2 R14.2 R15.2 R30.2 R31.2 R32.2 R36.1 R44.2 R49.2 R53.1 R56.2 R57.2 R60.2 SW3.2 SW5.1 U1.1 U1.29 U1.30 U4.5 U4.8 U6.8 U7.7 U9.20 U9.31 U9.42 U9.50 U9.56 U10.14 U11.6 | length 19933.4
  Top Layer w10: R44.2@1340,1535.43 1504.57,1535.43 1540,1500 ; SW5.1@1408.58,1036.5 1408.58,1041.42 1540,1172.83 1540,1500 ; v1(2017.72,3966.54) 2017.72,3893.23 C23.2@2021.89,3889.06 2021.89,3884.13 2112.03,3794 2141.56,3794 2200.61,3734.94 2306.46,3734.94 2307.36,3734.04 IC3.32@2307.36,3710.91 ; C24.2@2080,3191.46 C24.2@2084.92,3191.46 ; IC3.48@2229.09,3337.36 2205.96,3337.36 2205.06,3336.46 2205.06,3311.59 C24.2@2084.92,3191.46 ; v1(2460,2942.91) R30.2@2460,3015.47 2260.91,3015.47 C24.2@2084.92,3191.46 ; IC3.19@2563.27,3710.91 2564.17,3711.81 2564.17,3742.74 2586.38,3764.94 2601.32,3764.94 2636.46,3800.08 C21.2@2636.46,3805 2636.46,3809.92 2666.5,3839.97 2666.5,3857.45 v1(2687.01,3877.95) ; IC3.64@2602.64,3259.09 2602.64,3235.96 2603.54,3235.06 2660.61,3235.06 2678.47,3217.2 v1(2687.01,3208.66) 2687.01,3213.53 2680.91,3219.63 IC3.1@2680.91,3337.36 ; IC3.13@2680.91,3573.58 2855.08,3573.58 v1(2893.7,3612.2) 2893.7,3617.08 2905.32,3628.69 U4.5@2905.32,3944.07 ; U4.8@2970.77,3950.47 3018.15,3950.47 3060.08,3908.54 C22.2@3065,3908.54 3528.54,3908.54 P14.9@3950,4330 ; U7.7@3027.2,2535.79 3027.2,2492.8 3040,2480 3180,2480 ; R36.1@3180,2375.43 3180,2480 ; v1(3180,2640) 3245.71,2574.29 3245.71,2545.71 ; v1(3360,1620) 3363.44,1616.56 3363.44,1600.18 3455.08,1508.54 C54.2@3460,1508.54 ; C37.2@3491.46,2780 3491.46,2775.08 3440,2723.62 C34.2@3440,2619.45 3440,2572.2 3413.5,2545.71 3245.71,2545.71 ; R11.2@3940,820 R14.2@3940,980 R15.2@3940,1140 R32.2@3940,1300 3940,1380 3811.46,1508.54 C54.2@3460,1508.54 ; SW3.2@4028.58,3248.9 4028.58,3264.65 4100,3336.06 v1(4100,3340) ; R53.1@4060,1860 4171.52,1860 4335.16,2023.64 4443.42,2023.64 4220,2247.07 4220,2347.07 ; C33.2@4140,3760 4144.92,3760 4164.92,3780 U6.8@4240,3780 4240.44,3779.56 4274.73,3779.56 ; v1(4220,2640) 4220,2347.07 ; v1(4220,3880) 4220.79,3880 4274.73,3826.06 4274.73,3779.56 ; R31.2@4264.57,3640 4264.57,3709.21 4274.73,3719.37 4274.73,3779.56 ; FB2.1@4443.42,2120 4443.42,2123.64 4220,2347.07 ; C55.2@4880,2580 4880,2584.92 4860,2604.92 4860,2700 4887.99,2727.99 4913.19,2727.99 U11.6@4920,2734.8 ; R56.2@4882.12,2833.06 4882.12,2762.84 4910.16,2734.8 U11.6@4920,2734.8 ; U9.20@4991.02,1845.12 4991.02,1748.98 v1(5020,1720) 5020,1718.99 5040,1698.99 C43.2@5040,1648.54 ; U9.56@5089.45,2286.06 5089.45,2392.36 C46.2@5100,2402.91 ; U9.31@5207.56,1845.12 5207.56,1772.44 v1(5260,1720) C44.2@5342.91,1720 ; U9.50@5207.56,2286.06 5207.56,2346.94 5220,2359.38 C53.2@5220,2400 5217.09,2402.91 C46.2@5100,2402.91 ; U9.42@5300.08,2095.12 5426.57,2095.12 C45.2@5431.46,2100 5447.12,2115.67 5447.12,2147.12 v1(5480,2180) ; v1(5835,1250) R6.2@5890.94,1250 ; v1(5850,1550) R7.2@5900.47,1550 ; C2.1@6255,2348.45 v1(6255,2420) ; R4.2@6955,2334.06 6969.69,2348.74 6993.87,2348.74 7010.13,2365 v1(7015,2365) ; v1(6965,3290) 7140,3290 IC2.1@7220,3210 ; R8.2@6984.37,1535 6989.37,1540 v1(7100,1540) ; 7190,1925 7192,1927 ; 1540,1500 1570.87,1530.87 R49.2@1680,1530.87 R57.2@2120,1530.87 2549.13,1530.87 R60.2@2560,1520 3317.6,1520 3347.6,1490 U10.14@3366.3,1490 3414.17,1490 3417.05,1492.87 3444.33,1492.87 C54.2@3460,1508.54 ; 3180,2480 3245.71,2545.71 ; U11.6@4920,2734.8 4929.84,2734.8 4945.43,2719.21 5020.79,2719.21 5060,2680 v1(5060,2580) 5060,2437.99 5095.08,2402.91 C46.2@5100,2402.91
  Top Layer w15: U1.29@7048.84,1946.5 7048.84,1937.8 7065,1921.64 ; U1.30@7068.53,1946.5 7068.53,1918.11 7065,1921.64 ; v1(7100,1540) 7122.43,1562.43 C6.2@7122.43,1649 7122.43,1737.43 ; U1.1@7132.5,1971.1 7147.9,1971.1 7192,1927 7192,1807 7122.43,1737.43 ; v1(7240,2620) 7240,2525.47 C8.1@7239.53,2525 C7.1@7239.53,2405 7248.88,2395.65 7248.88,2078.88 ; 7065,1921.64 7065,1750.43 C5.2@7065.43,1750 7078,1737.43 7122.43,1737.43
  Layer 1 w10: v1(5060,2580) 5060,2320 5220,2160 5460,2160 ; v1(5260,1720) 5460,1920 5460,2160 ; v1(5480,2180) 5460,2160
  Layer 2 w10: v1(3360,1620) 3360,2460 v1(3180,2640) v1(4220,2640) 4560,2640 4600,2600 5038.99,2600 5058.99,2580 v1(5060,2580) ; v1(4100,3340) 4300,3540 4300,3800 v1(4220,3880) ; v1(5020,1720) v1(5260,1720)
  Bottom Layer w10: v1(2460,2942.91) 2536,3018.91 2536,3111.28 2633.38,3208.66 v1(2687.01,3208.66) 2719.02,3176.65 2722.96,3176.65 2764.76,3134.84 C27.2@2764.76,3129.92 ; v1(2893.7,3612.2) 3000.99,3612.2 C20.2@3001.97,3611.22
+5V: C15.2 C17.2 J2.3 J3.1 J7.3 U3.3 | length 3157.4
  Top Layer w30: C17.2@5125,3701.46 5115,3701.46 C15.2@5115,3498.43 5115,3498 5377,3498 U3.3@5405,3470
  Layer 1 w10: J3.1@5781.67,4596.81 5864.49,4514 6434,4514 J2.3@6520,4600 6606,4514 6914,4514 J7.3@7000,4600
  Layer 2 w30: U3.3@5405,3470 5405,4220.14 J3.1@5781.67,4596.81
+12V: C12.2 C13.2 C16.2 J4.1 J5.1 J6.1 U2.1 U3.1 | length 2702.6
  Top Layer w30: J5.1@5394.45,4596.81 5645,4346.26 C12.2@5645,3880 ; U3.1@5605,3470 5605,3535 5588.54,3551.46 C16.2@5588.54,3620 5716,3620 5836,3740 5836,3850 5806,3880 5790,3880 ; C12.2@5644.53,3880 C12.2@5645,3880 ; C13.2@5790,3838.54 5790,3880 ; U2.1@5920,3915 5825,3915 5790,3880 ; C12.2@5645,3880 5790,3880
  Layer 1 w30: J6.1@4620,4596.81 4724.81,4492 4902.41,4492 J4.1@5007.22,4596.81 5088.04,4516 5313.64,4516 J5.1@5394.45,4596.81
GND: C1.2 C3.1 C4.2 C5.1 C6.1 C7.2 C8.2 C10.1 C11.1 C12.1 C13.1 C14.1 C15.1 C16.1 C17.1 C18.2 C19.2 C20.1 C21.1 C22.1 C23.1 C24.1 C25.1 C26.1 C27.1 C28.1 C29.1 C30.1 C31.1 C32.1 C33.1 C34.1 C35.1 C36.2 C37.1 C38.1 C39.1 C40.1 C41.1 C42.1 C43.1 C44.1 C45.1 C46.1 C47.2 C48.2 C49.1 C50.1 C52.1 C53.1 C54.1 C55.1 C56.2 C57.2 IC1.4 IC2.8 IC3.12 IC3.18 IC3.31 IC3.47 IC3.63 J2.4 J3.2 J4.2 J5.2 J6.2 J7.4 J8.2 J9.A1 J9.A12 J9.B1 J9.B12 L2.1 P4.9 P4.10 P5.9 P5.10 P7.1 P7.2 P10.9 P10.10 P14.1 P14.2 P15.9 P15.10 Q2.2 Q3.2 Q4.2 Q5.2 R3.1 R5.1 R20.1 R21.1 R26.1 R27.1 R38.1 R39.1 R40.1 R41.1 R42.1 R43.1 R47.2 R55.1 RF.2 SW3.3 SW6.2 SW7.2 SW8.2 U1.33 U2.2 U3.2 U4.2 U4.3 U4.6 U4.7 U5.7 U5.9 U6.3 U7.2 U7.5 U8.3 U9.1 U9.5 U9.10 U9.11 U9.13 U9.15 U9.25 U9.35 U9.47 U9.51 U10.7 U10.9 U10.11 U10.13 U11.2 Y1.2 Y1.4 | length 38334.5